# Altium PCB MCU_Module.PcbDoc (part 1 of 2)
Units mil, origin at the board's own origin, x right, y up, seen from the top; angles counter-clockwise.
Board outline 3715 x 2510 mil, 2 copper layers (Top Layer, Bottom Layer); 96 components, 85 nets, 438 pads, 67 vias.
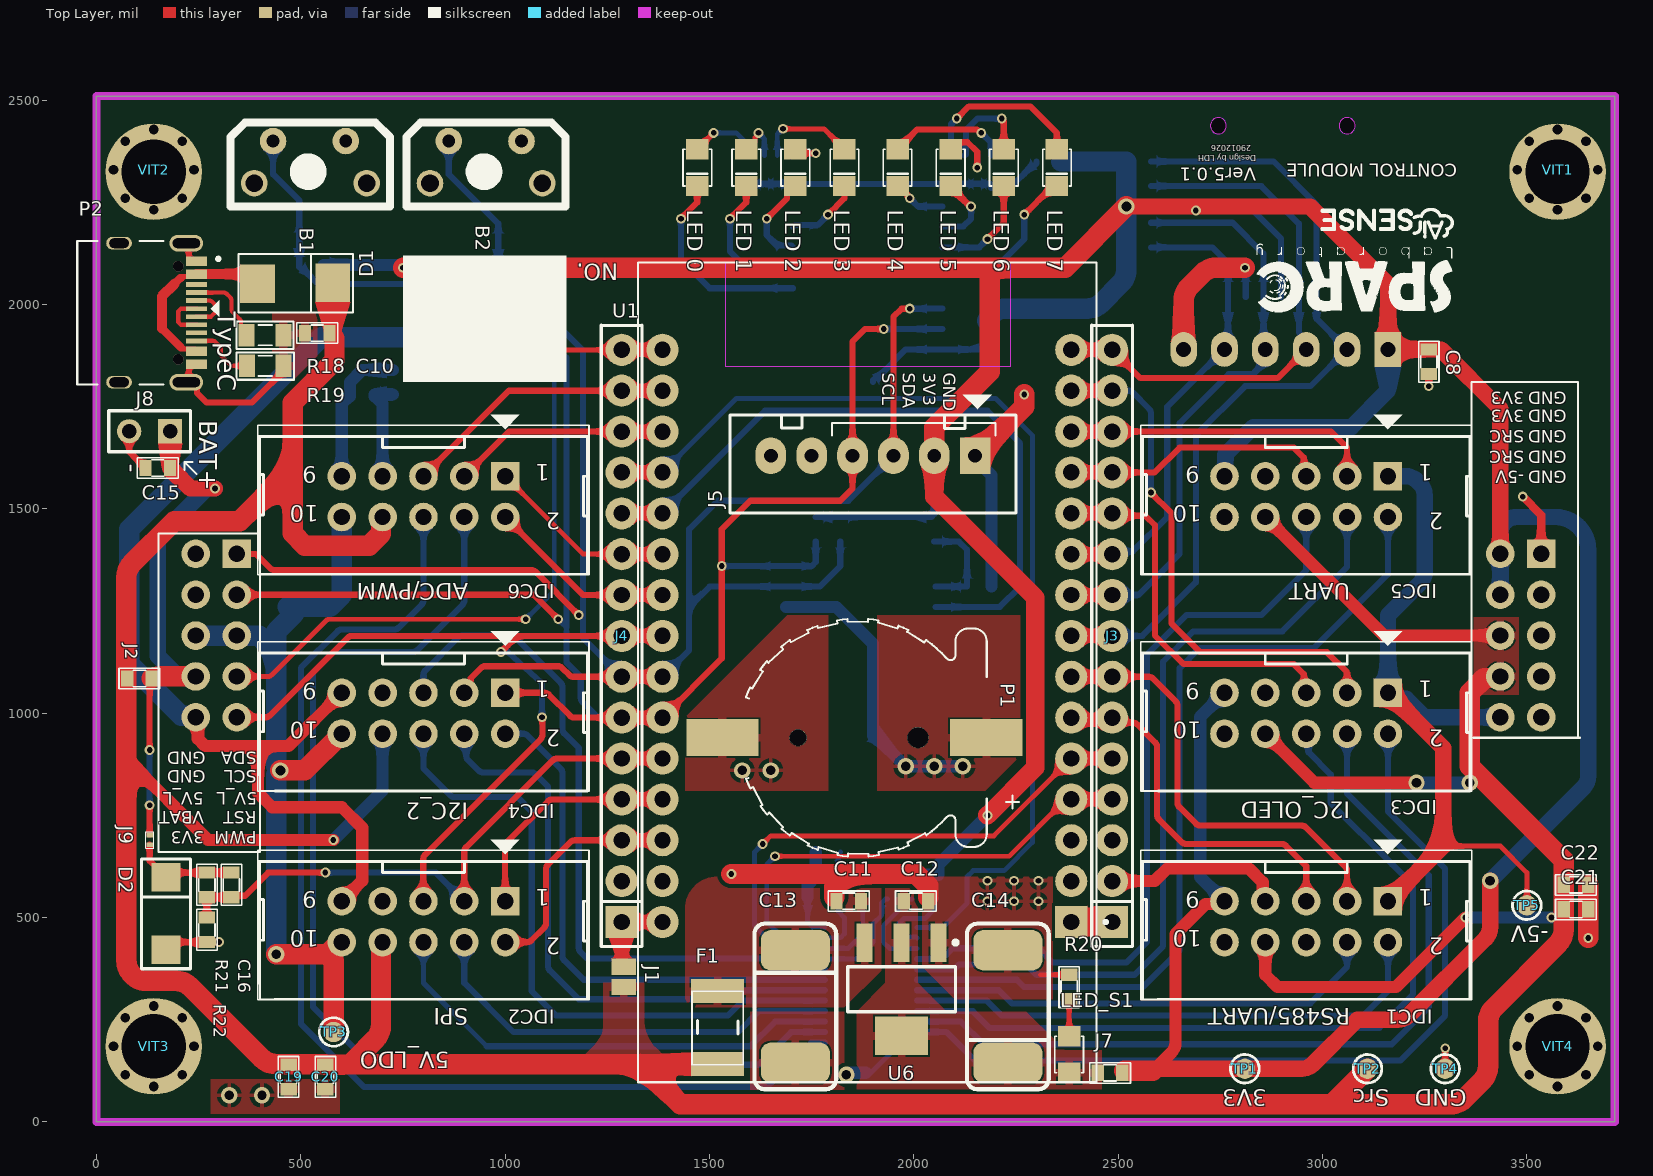
[diagram p0: Top Layer view]
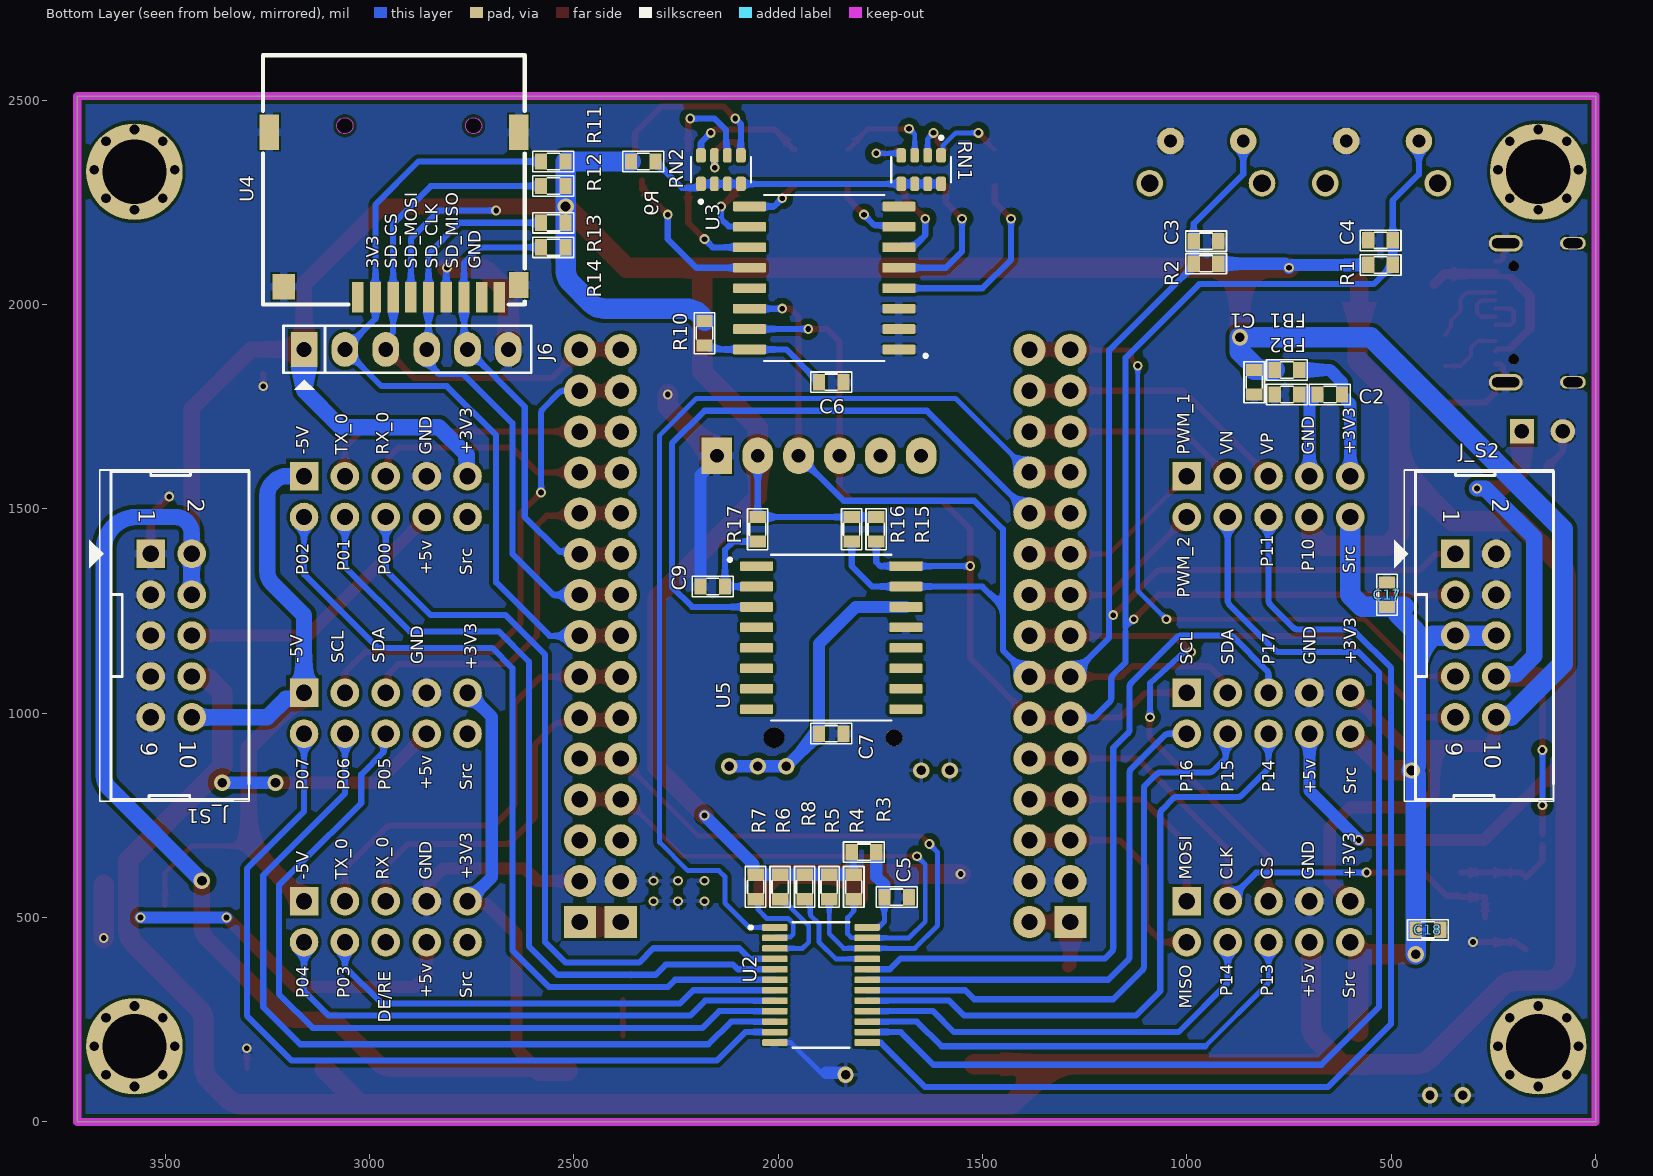
[diagram p1: Bottom Layer view, seen from below]
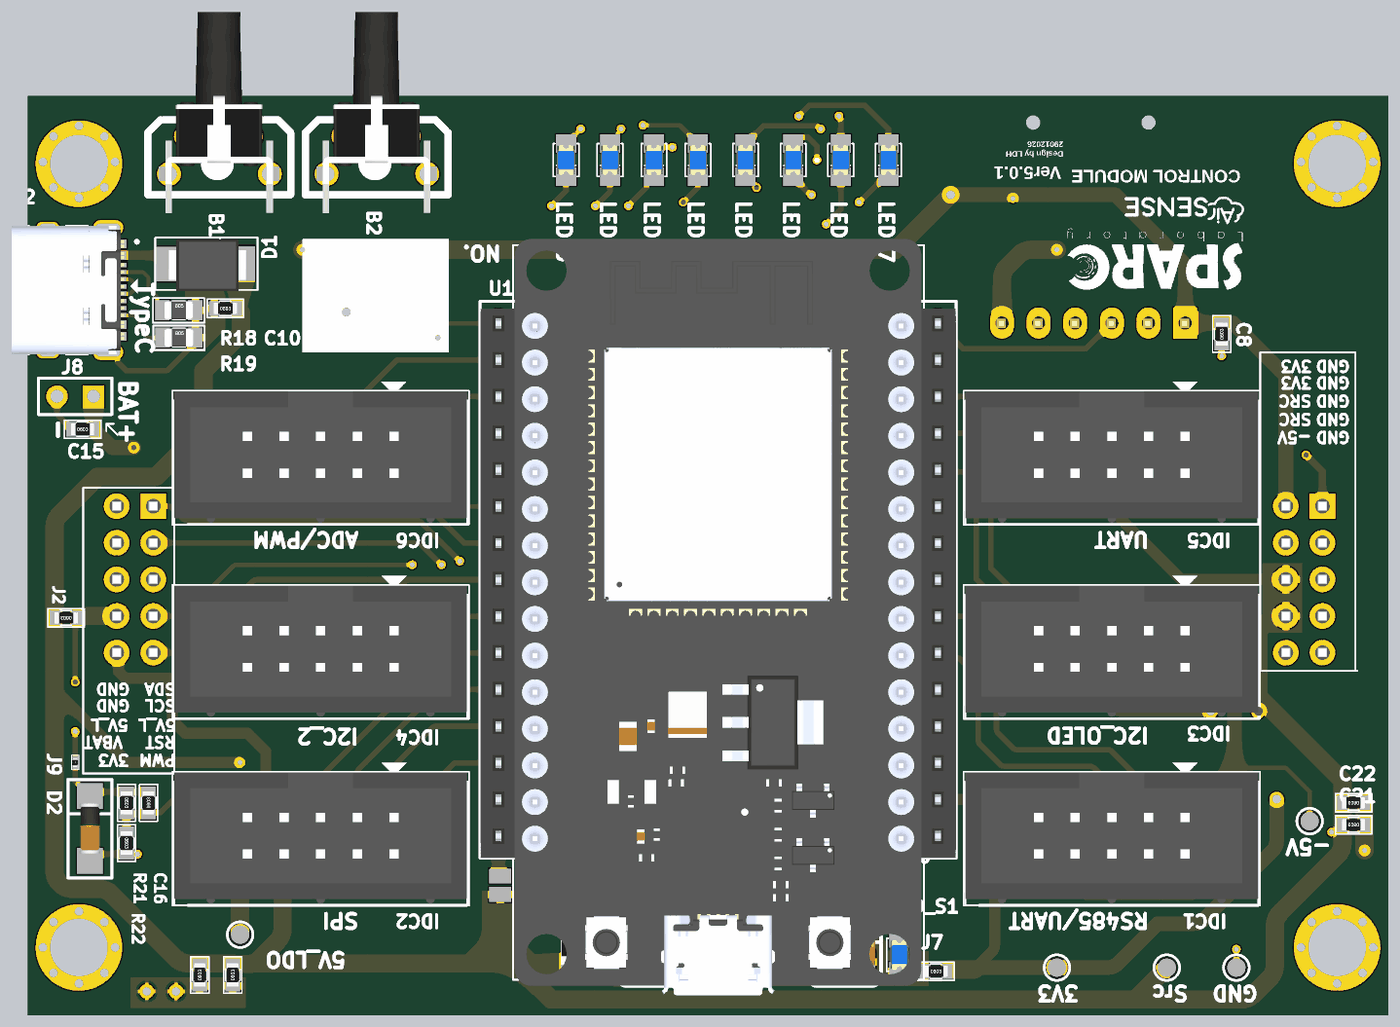
[diagram p3: 3D render of the assembled board from above, using the file's embedded part models]
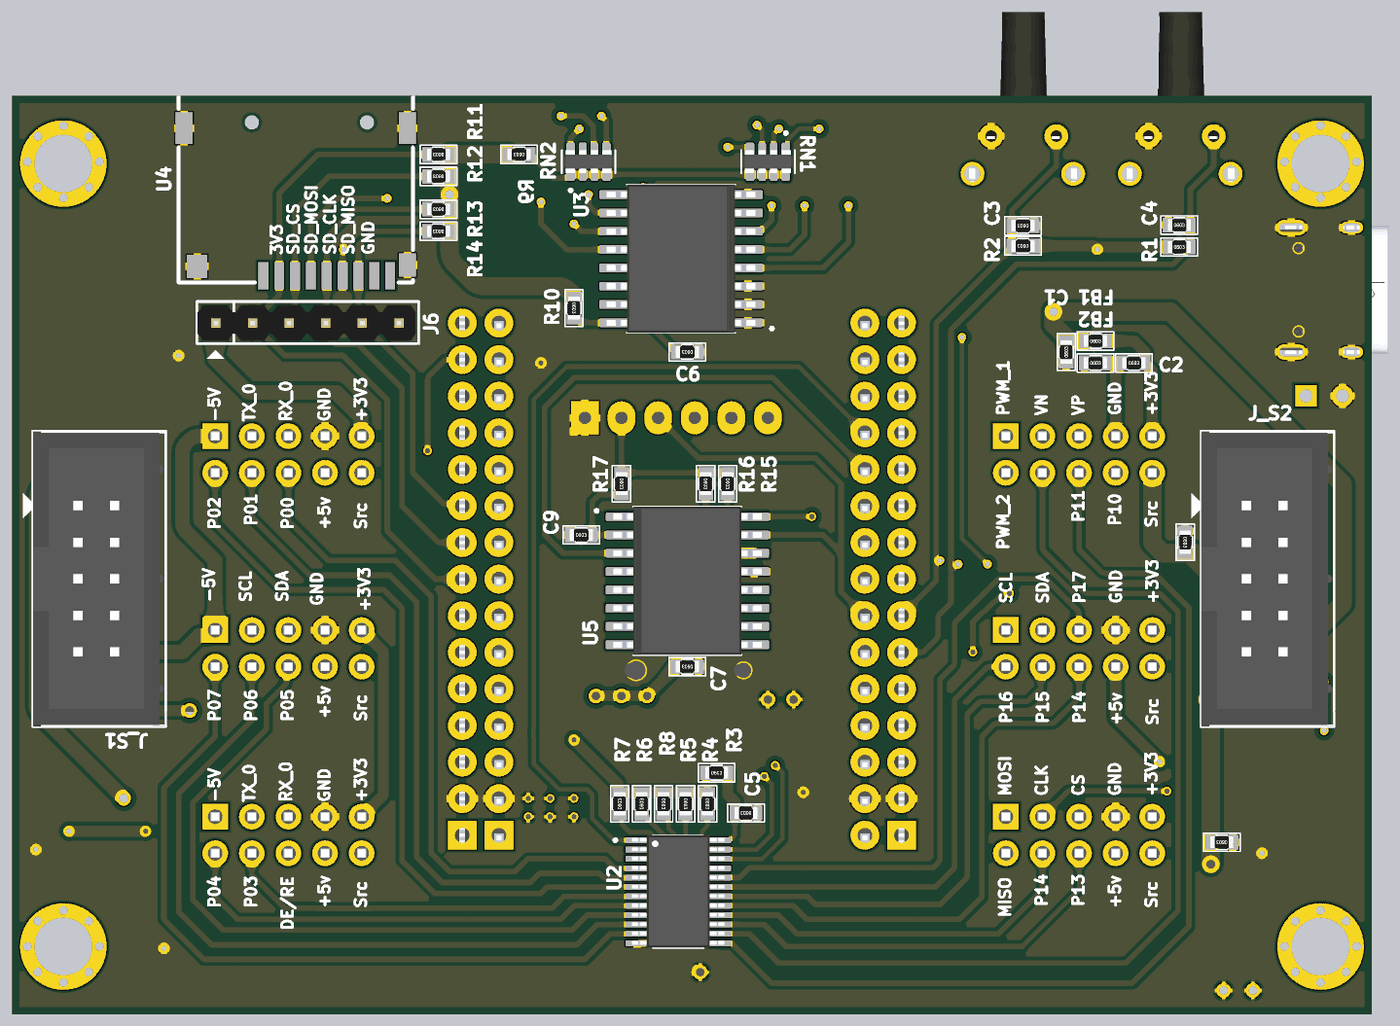
[diagram p4: 3D render of the assembled board from below, using the file's embedded part models]

## Layer stack, top to bottom
Top Solder: solder mask 0.4, Solder Resist, Dk 3.5
Top Layer: signal copper 1.4
Dielectric 1: dielectric 12.6, FR-4, Dk 4.8
Bottom Layer: signal copper 1.4
Bottom Solder: solder mask 0.4, Solder Resist, Dk 3.5

## Board outline
0,0 0,2510 3715,2510 3715,0

## Design rules (kind name [scope] priority, off if disabled: settings)
Clearance [All] p1: gap=0 ignorepadtopadclearanceinfootprint=TRUE except(4: Arc-Via Track-Via SMDPad-SMDPad SMDPad-Via SMDPad-Fill Via-Via; 5: Arc-Arc Arc-Track Track-Track; 6: Arc-SMDPad Arc-THPad Track-SMDPad Track-THPad; 8: SMDPad-THPad SMDPad-Poly SMDPad-Region THPad-THPad THPad-Fill THPad-Poly THPad-Region Fill-Fill Fill-Poly Fill-Region Poly-Poly Poly-Region Region-Region; 10: Arc-Fill Arc-Poly Arc-Region Track-Fill Track-Poly Track-Region THPad-Via; 15: Via-Fill Via-Poly Via-Region)
ComponentClearance [InComponent('U1') vs InComponent('J1')] p1: gap=5 collisioncheckmode=3 verticalgap=5 showdistances=FALSE
HoleSize [All] p1: absolutevalues=TRUE maxlimit=500 minlimit=0 maxpercent=80.000 minpercent=20.000
HoleToHoleClearance [All] p1: gap=0 allowstackedmicrovias=TRUE
MinimumSolderMaskSliver [All] p1: minsoldermaskwidth=0
PlaneClearance [All] p1: clearance=15
PlaneConnect [InNet('GND')] p1: planeconnectstyle=Relief reliefexpansion=20 reliefentries=4 reliefconductorwidth=10 reliefairgap=0
PolygonConnect [All] p1: connectstyle=Relief reliefconductorwidth=20 reliefentries=4 polygonreliefangle="90 Angle" airgapwidth=4
RoutingVias [All] p1: holewidth=28 width=50 viastyle="Through Hole" minholewidth=0 minwidth=20 maxholewidth=300 maxwidth=500 viatemplateguid#1={6EDF6A98-BD5D-4A24-8F05-06F2D03EDB93} viatemplateguid#2={62FAE1AC-254A-4F7D-8758-EC193F30DADA} viatemplateguid#3={902EE12D-42A8-4A52-AAC7-77C11EAEBDF5} viatemplateguid#4={5154B89B-655B-4F70-9889-5CE84DFEF99B} viatemplatename#1=v61h30 viatemplatename#2=v61h30_503323056 viatemplatename#3=v127h71m0 viatemplatename#4=v127h71m0_503323056
SilkToSilkClearance [All] p1: silktosilkclearance=0
SilkToSolderMaskClearance [IsPad] p1: minsilkscreentomaskgap=0 clearancetoexposedcopper=TRUE
SolderMaskExpansion [All] p1: expansion=4 istentingtop=FALSE
SupplyNets "Schematic Supply Nets_7" [InNet('VIN')] p1: voltage=0.000
SupplyNets "Schematic Supply Nets_2" [InNet('5V_LDO')] p2: voltage=0.000
SupplyNets "Schematic Supply Nets_8" [InNet('V_BAT')] p3: voltage=0.000
SupplyNets "Schematic Supply Nets_6" [InNet('3.3V_A')] p4: voltage=0.000
SupplyNets "Schematic Supply Nets" [InNet('GND_A')] p5: voltage=0.000
SupplyNets "Schematic Supply Nets_5" [InNet('-5V')] p6: voltage=0.000
SupplyNets "Schematic Supply Nets_3" [InNet('3.3V')] p7: voltage=0.000
SupplyNets "Schematic Supply Nets_1" [InNet('GND')] p8: voltage=0.000
Width [All] p1: maxlimit=50 minlimit=10 preferedwidth=15
22 further rules are at their usual default settings.

## Classes and differential pairs
component class MCU_Src: C10 C11 C12 C13 C14 C15 C16 C17 C18 C19 C20 C21 C22 D1 D2 F1 J7 J8 J9 LED_S1 P2 R18 R19 R20 R21 R22 U6
component class MCU: B1 B2 BT1 C1 C2 C3 C4 C5 C6 C7 C8 C9 ESP1 FB1 FB2 IDC1 IDC2 IDC3 IDC4 IDC5 IDC6 J1 J2 J3 J4 J5 J6 J_S1 J_S2 JP1 "LED 0" "LED 1" "LED 2" "LED 4" "LED 6" P1 R1 R2 R3 R4 R5 R6 R7 R8 R9 R10 R11 R12 R13 R14 R15 R16 R17 RN1 RN2 TP1 TP2 TP3 TP4 TP5 U1 U2 U3 U4 U5 VIT1 VIT2 VIT3 VIT4 VIT5 VIT6

## Components (designator, comment, footprint, x,y, rotation, side; value= is the part's Value field where it differs from the comment)
B1 "SW" "BUTTON NGHIENG" 538.03,2390 r180 top value="SW chip 2 pin"
B2 "SW" "BUTTON NGHIENG" 968.03,2390 r180 top value="SW chip 2 pin"
C1 "104" CAP_0603 835,1810 r90 bottom value=33p
C2 "104" CAP_0603 650,1780 r180 bottom value=33p
C3 "104" CAP_0603 953.03,2155 r0 bottom value=33p
C4 "104" CAP_0603 526.03,2157 r180 bottom value=33p
C5 "104" CAP_0603 1710,550 r0 bottom value=33p
C6 "104" CAP_0603 1870,1810 r0 bottom value=33p
C7 "104" CAP_0603 1870,950 r0 bottom value=33p
C8 "104" CAP_0603 3260,1860 r90 top value=33p
C9 "104" CAP_0603 2160,1310 r180 bottom value=33p
C10 "104" CAP_0603 540,1930 r0 top value=33p
C11 "104" CAP_0603 1840.57,540 r0 top value=33p
C12 "104" CAP_0603 2005,540 r180 top value=33p
C13 "107" CAP_7343 1710,285 r270 top
C14 "107" CAP_7343 2230,280 r90 top
C15 "104" CAP_0603 150,1600 r0 top value=33p
C16 "104" CAP_0603 330,580 r90 top value=33p
C17 "104" CAP_0603 510,1290 r270 bottom value=33p
C18 "104" CAP_0603 410,470 r0 bottom value=33p
C19 "104" CAP_0603 470,110 r90 top value=33p
C20 "104" CAP_0603 560,110 r90 top value=33p
C21 "104" CAP_0603 3620,520 r180 top value=33p
C22 "104" CAP_0603 3620,580 r180 top value=33p
D1 "Diode Schottky" DIO-214AA(SMB) 480,2050 r180 top
D2 "Zn" DIODE_ZENER_SMD 170,510 r90 top
F1 "2A 8V" RES-SMD-1812 1520,220 r90 top value=Fuse
FB1 "30R/3A" RES-SMD-0603 755,1840 r180 bottom
FB2 "30R/3A" RES-SMD-0603 755,1780 r180 bottom
IDC1 "RS485/UART" IDC10 2960,440 r180 top locked value="Header 5x2"
IDC2 "SPI" IDC10 800,440 r180 top locked value="Header 5x2"
IDC3 "I2C_OLED" IDC10 2960,950 r180 top locked value="Header 5x2"
IDC4 "I2C_2" IDC10 800,950 r180 top locked value="Header 5x2"
IDC5 "UART" IDC10 2960,1480 r180 top locked value="Header 5x2"
IDC6 "ADC/PWM" IDC10 800,1480 r180 top locked value="Header 5x2"
J1 "Jumper2" JUMPER2 1290,380 r90 top net-tie
J2 "Jumper2" RES-SMD-0402 105,1085 r180 top net-tie
J3 "JP15" JP15-C1T 2485,489.17 r90 top
J4 "JP15" JP15-C1T 1285,489.17 r90 top
J5 "Header6" Header6 2150,1630 r180 top
J6 "Header6" JP6 3160,1890 r180 bottom
J7 "Jumper2" RES-SMD-0402 2480,120 r0 top net-tie
J8 "Header 2" HDR1X2 180,1690 r180 top
J9 "Jumper2" RES-SMD-0201 130,690 r270 top
J_S1 "SOURCE" IDC10 3435,1190 r270 bottom locked value="Header 5x2"
J_S2 "SOURCE_SIG" IDC10 243,1190 r270 bottom locked value="Header 5x2"
"LED 0" "LED" LED-0805-Blue 1470,2380 r270 top value="LED 3 ly Single Colour"
"LED 1" "LED" LED-0805-Blue 1590,2380 r270 top value="LED 3 ly Single Colour"
"LED 2" "LED" LED-0805-Blue 1710,2380 r270 top value="LED 3 ly Single Colour"
"LED 3" "LED" LED-0805-Blue 1830,2380 r270 top value="LED 3 ly Single Colour"
"LED 4" "LED" LED-0805-Blue 1960,2380 r270 top value="LED 3 ly Single Colour"
"LED 5" "LED" LED-0805-Blue 2090,2380 r270 top value="LED 3 ly Single Colour"
"LED 6" "LED" LED-0805-Blue 2220,2380 r270 top value="LED 3 ly Single Colour"
"LED 7" "LED" LED-0805-Blue 2350,2380 r270 top value="LED 3 ly Single Colour"
LED_S1 "LED_S" LED-0805-Blue 2380,120 r90 top value="LED 3 ly Single Colour"
P1 "Cell Coin" "S8411 - 45R" 1863.35,940 r90 top
P2 "USB - TypeC - 16P" "USB C 16P" 130,1980 r270 top
R1 "10k" RES-SMD-0603 526.03,2097 r180 bottom
R2 "10k" RES-SMD-0603 953.02,2100 r0 bottom
R3 "0R" RES-SMD-0603 1790,660 r180 bottom
R4 "4.7k" RES-SMD-0603 1815,575 r270 bottom
R5 "4.7k" RES-SMD-0603 1875,575 r270 bottom
R6 "0R" RES-SMD-0603 1995,575 r90 bottom
R7 "0R" RES-SMD-0603 2055,575 r90 bottom
R8 "0R" RES-SMD-0603 1935,575 r270 bottom
R9 "0R" RES-SMD-0603 2330,2350 r0 bottom
R10 "0R" RES-SMD-0603 2180,1930 r270 bottom
R11 "4.7k" RES-SMD-0603 2550,2350 r0 bottom
R12 "4.7k" RES-SMD-0603 2550,2290 r0 bottom
R13 "4.7k" RES-SMD-0603 2550,2200 r0 bottom
R14 "4.7k" RES-SMD-0603 2550,2140 r0 bottom
R15 "4.7k" RES-SMD-0603 1760,1450 r270 bottom
R16 "4.7k" RES-SMD-0603 1820,1450 r270 bottom
R17 "0R" RES-SMD-0603 2050,1450 r270 bottom
R18 "5k1" RES-SMD-0805 412.5,1925 r0 top
R19 "5k1" RES-SMD-0805 413,1850 r0 top
R20 "220" RES-SMD-0603 2380,330 r90 top
R21 "15k 1%" RES-SMD-0603 270,580 r270 top
R22 "43k 1%" RES-SMD-0603 270,470 r270 top
RN1 "20R" RN4_Dual 1650,2330 r270 bottom
RN2 "20R" RN4_Dual 2140,2330 r90 bottom
TP1 "3V3" "Testpoint 50ml" 2810,130 r90 top net-tie
TP2 "Src" "Testpoint 50ml" 3110,130 r90 top net-tie
TP3 "5V_LDO" "Testpoint 50ml" 580,220 r90 top net-tie
TP4 "GND" "Testpoint 50ml" 3300,130 r90 top net-tie
TP5 "-5V" "Testpoint 50ml" 3500,530 r0 top net-tie
U1 "ESP32-WROOM-DEVKIT-V1" ESP32-DEVKIT-V1 1885,1100 r180 top locked
U2 "PCF8575" TSSOP-24 1895,335 r180 bottom
U3 "PCF8574" "SOIC 16 W" 1887.32,2065 r0 bottom
U4 "TF Card Micro SD Card" "SD Card TF Card Micro" 2940,2220 r0 bottom
U5 "DS3231 SMD" "SOIC 16 W" 1870,1185 r180 bottom
U6 "LM1117" SOT-223 1970,324.58 r180 top
VIT1 "1" "Screw Hole 4mm"#1 3575,2330 r0 top locked net-tie
VIT2 "1" "Screw Hole 4mm"#1 140,2330 r0 top locked net-tie
VIT3 "1" "Screw Hole 4mm"#2 140,185 r0 top locked net-tie
VIT4 "1" "Screw Hole 4mm"#2 3575,185 r0 top locked net-tie

## Footprints (in the part's own frame and the unit in brackets; to place one, negate y for a bottom-side part, rotate by r counter-clockwise, add the part's x,y. Pads: shape width x height; smd on the part's side, far side on the other; paste and mask are expansions set on the pad)
"BUTTON NGHIENG" [mil] "BUTTON NGHIENG"
  round 65 hole 31.5: 1(-71.97,-10) 2(105.97,-10)
  round 65 hole 43.31: ""(-123,93) ""(152,93)
  silkscreen extent -180,-55 210,150, body extent -150,-348 180,200, height 494
CAP_0603 [mil]
  rect 30x40 smd: 1(-30,0) 2(30,0)
  silkscreen extent -50,-25 50,25, body extent -31,-16 31,16, height 17
CAP_7343 [mm] "Capacitor Tantalum 7343"
  rrect50% 2.5x4.3 smd: 1(-3.429,0) 2(3.556,0)
  silkscreen extent -5.08,-2.54 5.21,2.54, body extent -3.75,-2.14 3.75,2.16, height 2.8
DIO-214AA(SMB) [mm] "DO-214AA Diode Middle Size"
  rect 2.16x2.4 smd: 1(2.184,-0.025) 2(-2.494,-0.076)
  silkscreen extent -3.76,-1.86 3.35,1.76, body extent -2.98,-1.76 2.42,1.86, height 2.43
DIODE_ZENER_SMD [mil]
  rect 70x70 smd: 1(-88.58,0) 2(88.58,0)
  silkscreen extent -135,-60 134,60, body extent -69,-29 69,29, height 57
ESP32-DEVKIT-V1 [mm] "Dual core, Wi-Fi: 2.4 GHz up to 150 Mbits/s,BLE (Bluetooth Low Energy) and legacy Bluetooth, 32 bits, Up to 240 MHz"
  rect 2x2 / inner round 2 / far side rect 2x2 hole 1.02: 1(-12.7,15.515)
  round 2 hole 1.02: 2(-12.7,12.975) 3(-12.7,10.435) 4(-12.7,7.895) 5(-12.7,5.355) 6(-12.7,2.815) 7(-12.7,0.275) 8(-12.7,-2.265) 9(-12.7,-4.805) 10(-12.7,-7.345) 11(-12.7,-9.885) 12(-12.7,-12.425) 13(-12.7,-14.965) 14(-12.7,-17.505) 15(-12.7,-20.045) 16(12.7,-20.045) 17(12.7,-17.505) 18(12.7,-14.965) 19(12.7,-12.425) 20(12.7,-9.885) 21(12.7,-7.345) 22(12.7,-4.805) 23(12.7,-2.265) 24(12.7,0.275) 25(12.7,2.815) 26(12.7,5.355) 27(12.7,7.895) 28(12.7,10.435) 29(12.7,12.975) 30(12.7,15.515)
  Top Layer keep-out region: 8.78,-25.475 -8.91,-25.475 -8.91,-18.985 8.78,-18.985
  silkscreen extent -14.95,-25.48 14.23,25.48, body extent -14.1,-25.9 14.1,26.55, height 12.77
HDR1X2 [mm] "Connector; Header; 2 Position"
  rect 1.5x1.5 hole 0.9: 1(0,0)
  round 1.5 hole 0.9: 2(2.54,0)
  silkscreen extent -1.27,-1.27 3.81,1.27, body extent -1.27,-1.27 3.81,1.27, height 7
Header6 [mil] "CON6"
  rect 75x90 hole 34: 1(0,0)
  oval 75x90 hole 34: 2(100,0) 3(200,0) 4(300,0) 5(400,0) 6(500,0)
  silkscreen extent -100,-150 600,140
IDC10 [mil]
  rect 70x70 hole 40: 1(-200,-100)
  round 70 hole 40: 2(-200,0) 3(-100,-100) 4(-100,0) 5(0,-100) 6(0,0) 7(100,-100) 8(100,0) 9(200,-100) 10(200,0)
  silkscreen extent -405,-250 405,141, body extent -400,-223 400,135, height 366
JP6 [mil] "JP6"
  rect 65x85 hole 36: 1(0,0)
  oval 65x85 hole 36: 2(100,0) 3(200,0) 4(300,0) 5(400,0) 6(500,0)
  silkscreen extent -50,-99 556,58, body extent -48,-50 548,48, height 323
JP15-C1T [mm] "15 row, straight, gold plating"
  rect 2x2 / inner round 2 / far side rect 2x2 hole 1.02: 1(0,0)
  round 2 hole 1.02: 2(2.54,0) 3(5.08,0) 4(7.62,0) 5(10.16,0) 6(12.7,0) 7(15.24,0) 8(17.78,0) 9(20.32,0) 10(22.86,0) 11(25.4,0) 12(27.94,0) 13(30.48,0) 14(33.02,0) 15(35.56,0)
  silkscreen extent -1.52,-1.27 37.08,1.27, body extent -1.52,-1.25 36.58,1.25, height 8.51
JUMPER2 [mil]
  rect 40x60 smd: 1(-50,0) 2(0,0)
LED-0805-Blue [mil]
  rect 50x55 smd: 1(0,0) 2(90,0)
  silkscreen extent 0,-35 90,35, body extent 5,-25 85,25, height 43
RES-SMD-0201 [mm]
  rect 0.3x0.4 smd: 1(-0.3,0) 2(0.3,0)
  silkscreen extent -0.51,-0.25 0.51,0.25, body extent -0.3,-0.15 0.3,0.15, height 0.22
RES-SMD-0402 [mil]
  rect 30x40 smd: 1(-30,0) 2(30,0)
  silkscreen extent -50,-25 50,25, body extent -31,-16 31,16, height 17
RES-SMD-0603 [mil]
  rect 30x40 smd: 1(-30,0) 2(30,0)
  silkscreen extent -50,-25 50,25, body extent -31,-16 31,16, height 17
RES-SMD-0805 [mil]
  rect 39.37x55 smd: 1(-45,0) 2(45,0)
  silkscreen extent -70,-34 70,33, body extent -39,-25 39,25, height 31
RES-SMD-1812 [mm] "Chip Capacitor, Body 3.2x2.5mm, IPC Medium Density"
  rect 1.5x3.3 smd: 1(-1.996,0) 2(2.54,0)
  silkscreen extent -2.04,-1.6 2.54,1.6, body extent -2,-1.6 2.5,1.6, height 0.6
RN4_Dual [mm]
  rrect50% 0.9x0.61 smd: 1(-0.885,1.24) 4(-0.885,-1.24) 5(0.885,-1.24) 8(0.885,1.24)
  rrect50% 0.9x0.53 smd: 2(-0.885,0.4) 3(-0.885,-0.4) 6(0.885,-0.4) 7(0.885,0.4)
  silkscreen extent -2.08,-1.86 0.8,1.86, body extent -0.8,-1.6 0.8,1.6, height 0.7
"S8411 - 45R" [mm] "Coin Cell Battery Retainer, Horizontal SMT, for CR1220 Coin Cell Batteries, Tape & Reeled"
  rect 2.3x4.5 smd: N(0,8.425) P(0,-7.975)
  round 1.05 hole 1.05 unplated: ""(0,3.725)
  round 1.3 hole 1.3 unplated: ""(0,-3.725)
  silkscreen extent -7.37,-10 7.37,6.96, body extent -7.37,-9.6 7.37,9.6, height 4.25
"Screw Hole 4mm"#1 [mm]
  round 0.6 hole 0.6: 1(-2.5,0) 1(-1.768,-1.768) 1(-1.768,1.768) 1(0,-2.5) 1(0,2.5) 1(1.768,-1.768) 1(1.768,1.768) 1(2.5,0)
  round 6 hole 4: 1(0,-0.127)
"Screw Hole 4mm"#2 [mm]
  round 0.6 hole 0.6: 1(-2.5,0) 1(-1.768,-1.768) 1(-1.768,1.768) 1(0,-2.5) 1(0,2.5) 1(1.768,-1.768) 1(1.768,1.768) 1(2.5,0)
  round 6 hole 4: 1(0,0)
"SD Card TF Card Micro" [mm] "MR01A-01211 TF Card Micro SD Card"
  rect 0.7x1.9 smd: 1(2.25,5.125) 2(1.15,5.125) 3(0.05,5.125) 4(-1.05,5.125) 5(-2.15,5.125) 6(-3.25,5.125) 7(-4.35,5.125) 8(-5.45,5.125) 9(-6.55,5.125)
  rect 1.2x1.6 smd: 10(-7.75,4.375)
  rect 1.2x2.2 smd: 11(-7.75,-5.125) 12(7.75,-5.125)
  rect 1.4x1.6 smd: 13(6.85,4.475)
  Keep-Out Layer board cut-out: -4.45,-5.525 -4.45,-5.624 -4.526,-5.808 -4.667,-5.949 -4.85,-6.025 -5.049,-6.025 -5.233,-5.949 -5.374,-5.808 -5.45,-5.624 -5.45,-5.525 -5.45,-5.425 -5.374,-5.242 -5.233,-5.101 -5.049,-5.025 -4.85,-5.025 -4.667,-5.101 -4.526,-5.242 -4.45,-5.425 -4.45,-5.525 -4.45,-5.525
  Keep-Out Layer board cut-out: 3.55,-5.527 3.55,-5.627 3.474,-5.811 3.333,-5.951 3.15,-6.027 2.951,-6.027 2.767,-5.951 2.626,-5.811 2.55,-5.627 2.55,-5.527 2.55,-5.428 2.626,-5.244 2.767,-5.104 2.951,-5.027 3.15,-5.027 3.333,-5.104 3.474,-5.244 3.55,-5.428 3.55,-5.527 3.55,-5.527
  Keep-Out Layer circle w0.025: c-4.95,-5.525 r0.5
  Keep-Out Layer circle w0.025: c3.05,-5.527 r0.5
  Keep-Out Layer region: -4.45,-5.525 -4.45,-5.624 -4.526,-5.808 -4.667,-5.949 -4.85,-6.025 -5.049,-6.025 -5.233,-5.949 -5.374,-5.808 -5.45,-5.624 -5.45,-5.525 -5.45,-5.425 -5.374,-5.242 -5.233,-5.101 -5.049,-5.025 -4.85,-5.025 -4.667,-5.101 -4.526,-5.242 -4.45,-5.425 -4.45,-5.525 -4.45,-5.525
  Keep-Out Layer region: 3.55,-5.527 3.55,-5.627 3.474,-5.811 3.333,-5.951 3.15,-6.027 2.951,-6.027 2.767,-5.951 2.626,-5.811 2.55,-5.627 2.55,-5.527 2.55,-5.428 2.626,-5.244 2.767,-5.104 2.951,-5.027 3.15,-5.027 3.333,-5.104 3.474,-5.244 3.55,-5.428 3.55,-5.527 3.55,-5.527
  silkscreen extent -8.13,-9.91 8.13,5.59
"SOIC 16 W" [mm] "SOIC 16-Leads, Body 10.5x7.5mm (max), Pitch 1.27mm, IPC Medium Density"
  rrect25% 2.06x0.6 smd: 1(-4.64,4.445) 2(-4.64,3.175) 3(-4.64,1.905) 4(-4.64,0.635) 5(-4.64,-0.635) 6(-4.64,-1.905) 7(-4.64,-3.175) 8(-4.64,-4.445) 9(4.64,-4.445) 10(4.64,-3.175) 11(4.64,-1.905) 12(4.64,-0.635) 13(4.64,0.635) 14(4.64,1.905) 15(4.64,3.175) 16(4.64,4.445)
  silkscreen extent -6.4,-5.15 3.75,5.15, body extent -5.15,-5.15 5.15,5.15, height 2.65
SOT-223 [mm] "SOT223, 4-Leads, Body 6.5x3.5mm, Pitch 2.3mm, Lead Span 7mm, IPC Medium Density"
  rect 1x2.4 smd: 1(-2.3,-2.9) 2(0,-2.9) 3(2.3,-2.9)
  rect 3.3x2.4 smd: 2(0,2.9)
  silkscreen extent -3.48,-3.02 3.35,1.4, body extent -3.23,-3.39 3.27,3.5, height 1.72
"Testpoint 50ml" [mil]
  round 50 smd: 1(0,0)
  silkscreen extent -35,-35 35,35
TSSOP-24 [mm] "TSSOP24"
  rrect25% 1.57x0.41 smd paste+0 mask+0.102: 1(-2.87,3.575) 2(-2.87,2.925) 3(-2.87,2.275) 4(-2.87,1.625) 5(-2.87,0.975) 6(-2.87,0.325) 7(-2.87,-0.325) 8(-2.87,-0.975) 9(-2.87,-1.625) 10(-2.87,-2.275) 11(-2.87,-2.925) 12(-2.87,-3.575) 13(2.87,-3.575) 14(2.87,-2.925) 15(2.87,-2.275) 16(2.87,-1.625) 17(2.87,-0.975) 18(2.87,-0.325) 19(2.87,0.325) 20(2.87,0.975) 21(2.87,1.625) 22(2.87,2.275) 23(2.87,2.925) 24(2.87,3.575)
  silkscreen extent -4.47,-3.9 1.77,3.9, body extent -3.2,-3.87 3.2,3.93, height 1.1
"USB C 16P" [mm]
  rect 0.6x1.3 smd: A1_B12(-3.2,2.921) A4_B9(-2.4,2.921) B1_A12(3.2,2.921) B4_A9(2.4,2.921)
  rect 0.3x1.3 smd: A5(-1.25,2.921) A6(-0.25,2.921) A7(0.25,2.921) A8(1.25,2.921) B5(1.75,2.921) B6(0.75,2.921) B7(-0.75,2.921) B8(-1.75,2.921)
  oval 1.05x2.1 hole 0.6 slot 1.7 at 90 deg: S1(-4.32,2.281) S2(4.32,2.281)
  oval 0.8x1.6 hole 0.6 slot 1.2 at 90 deg: S3(-4.32,-1.899) S4(4.32,-1.899)
  round 0.65 hole 0.65 unplated: ""(-2.89,1.781) ""(2.89,1.781)
  silkscreen extent -4.47,-4.5 4.47,4.37, body extent -4.47,-4.41 4.47,3.4, height 3.26

## Part data
B1 B2: library part SW2, "Switch button 2 pin"
C1 C2 C3 C4 C5 C6 C7 C8 C9 C11 C12 C15 C16 C17 C18 C19 C20 C21 C22: library part CapSMD, "Capacitor SMD 0603", LatestRevisionDate=17-Jul-2002, LatestRevisionNote="Re-released for DXP Platform.", PackageReference=RAD-0.3, Published=8-Jun-2000, Publisher="Altium Limited"
C10: library part CapSMD, "Capacitor", LatestRevisionDate=17-Jul-2002, LatestRevisionNote="Re-released for DXP Platform.", PackageReference=RAD-0.3, Published=8-Jun-2000, Publisher="Altium Limited"
C13 C14: library part CAP_TAN_SMD, "Polazied Tantalum Capacitor"
D1: "SS54"
D2: library part Zenner, "generic zenner diode"
F1: library part Fuse, "https://linhkien.cxtvn.com/5126-cau-chi-tu-phuc-hoi-pptc-2a-8v-smd1812.html", Designed by=VanDungEvn
FB1 FB2: library part "Ferrit Bead", "FB SMD 0603"
IDC1 IDC2 IDC3 IDC4 IDC5 IDC6 J_S1 J_S2: library part "IDC 5X2"
J1 J2 J7 J9: "Jumper, 2-Pin"
J3 J4: "WR-PHD 2.54 mm Angled Socket Header", Manufacturer="W¨¹rth Elektronik eiSos GmbH", partNo=613015143121, ComponentLink1 Description=Manufacturer, ComponentLink1URL=http://www.we-online.com, ComponentLink2 Description=Datasheet, ComponentLink2URL=http://katalog.we-online.de/em/datasheet/6130xx143121.pdf, Created by="Karrer Zheng", Created Date="29 March 2013", NoPins=15
J5 J6: "Header IDC, 6 x 1 Pin Vertical 2.54mm Pitch (Non-Boxed, Male)", Manufacturer="W¨¹rth Elektronik eiSos GmbH", partNo=613002143121, ComponentLink1 Description=Manufacturer, ComponentLink1URL=http://www.we-online.com, ComponentLink2 Description=Datasheet, ComponentLink2URL=http://katalog.we-online.de/em/datasheet/6130xx143121.pdf, Created by="Karrer Zheng", Created Date="29 March 2013", NoPins=02
J8: "Header, 2-Pin", LatestRevisionDate=17-Jul-2002, LatestRevisionNote="Re-released for DXP Platform.", Publisher="Altium Limited"
"LED 0" "LED 1" "LED 2" "LED 3" "LED 4" "LED 5" "LED 6" "LED 7": "LED Single colour Green and Red"
LED_S1: library part LED, "LED Single colour Green and Red"
P1: library part S8411-45R, "Coin Cell Battery Retainer, Horizontal SMT, for CR1220 Coin Cell Batteries, Tape & Reeled"
R1 R2 R3 R4 R5 R6 R7 R8 R9 R10 R11 R12 R13 R14 R15 R16 R17 R20 R21 R22: library part "Resistor - SMD", "Resistor SMD 0603", Manufacturer="Generic Components", Class=Passive, Published=08/06/2000, Publisher="Altium Hobart Technology Centre"
R18 R19: library part "Resistor - SMD", "Resistor SMD", Manufacturer="Generic Components", Class=Passive, Published=08/06/2000, Publisher="Altium Hobart Technology Centre"
RN1 RN2: library part RN4_Dual, "RN4 Dual resistor"
TP1 TP2 TP3 TP4 TP5: library part Testpoint
U1: "EVAL BOARD FOR ESP-WROOM-32"
U2: library part PCF8575DW, "https://shopee.vn/Set-5-Linh-Ki%E1%BB%87n-%C4%90i%E1%BB%87n-T%E1%BB%AD-Pcf8575Ts-Pcf8575-Ssop-24-Pcf8575Pwr-Pf575-Tssop-24-i.354017206.7468807321?extraParams=%7B%22display_model_id%22%3A25981768845%2C%22model_selection_logic%22%3A3%7D&sp_atk=da7bae07-f57c-4d15-a7da-c831ba5df15d&xptdk=da7bae07-f57c-4d15-a7da-c831ba5df15d"
U3: "I2C PORT EXPANDER", Frequency - Clock=100KHz, Manufacturer="NXP Semiconductors", Manufacturer Part Number=PCF8574T/3,512, Operating Temperature="-40°C ~ 85°C", Package / Case="16-SOIC (7.5mm Width)", Supplier Part Number=568-1076-5-ND, Voltage - Supply="2.5 V ~ 6 V", Category="Integrated Circuits (ICs)", Includes=POR, Interface=I²C, Interrupt Output=Yes, Number of I /O=8, Packaging=Tube, RoHS="RoHS Compliant", Supplier=Digi-Key, Supplier 1=Digi-Key, Supplier Part Number 1=568-1076-5-ND
U4: "https://linhkien.cxtvn.com/5532-mr01a-01211-tf-card-micro-sd-card.html"
U5: "SOIC"
U6: "3V3 5V LDO, AMS1117, LDI1117", Creator="Nguyen Ba Bien", Website=http://group3i.net
VIT1 VIT2 VIT3 VIT4: library part VIT, "Oc Vit"
P2: componentlink1description="New link", ComponentLink1URL=https://linhkien.cxtvn.com/6914-cong-type-c-cai-16p-usb-31-v2.html

## Via types
v1: diameter 24, hole 14, Top Layer to Bottom Layer, 52 vias
v2: diameter 40, hole 23, Top Layer to Bottom Layer, 9 vias
v3: diameter 40, hole 24, Top Layer to Bottom Layer, 6 vias

## Nets (pads, with @x,y where several pads share a name; then routed paths per layer and width w, separated by ;. In a path a pad name is that pad's centre, name@x,y a point inside that pad or via, vN(x,y) a via of type N, cw(c..) or ccw(c..) an arc to the next point about the centre after c; other vN are vias at no path point)
3.3V: C1.2 C8.2 FB1.1 IDC1.9 IDC2.9 IDC3.9 IDC4.9 IDC5.9 J5.2 J6.1 J7.2 J_S1.2 J_S1.4 J_S2.10 R1.1 R2.1 R3.1 R4.1 R5.1 R6.2 R7.2 R8.1 R9.2 R10.1 R11.1 R12.1 R13.1 R14.1 R15.1 R16.1 R17.1 TP1.1 U4.4 | length 14559.3
  Top Layer w30: J_S2.10@243,990 248.07,984.93 248.07,937.57 265.64,920 395,920 ; IDC2.9@600,540 650,590 650,720 600,770 430,770 395,805 395,920 ; IDC4.9@600,1050 470,920 395,920 ; 2590,130 2631.24,171.24 ccw(c2610,192.43) 2634,174.43 ccw(c2610,192.43) 2640,192.43 2640,460 2713.43,533.43 2753.43,533.43 IDC1.9@2760,540
  Top Layer w40: v3(2520,2240) 2969.47,2240 3160,2049.47 J6.1@3160,1890 3290,1890 3435,1745 J_S1.2@3435,1390 ; 2590,130 TP1.1@2810,130 2948.43,130 ccw(c2948.43,170) 2972.43,138 ccw(c2948.43,170) 2976.72,141.72 3085,250 3183.43,250 ccw(c3183.43,290) 3207.43,258 ccw(c3183.43,290) 3211.67,261.67 3398.33,448.33 ccw(c3370,476.57) 3402,452.57 ccw(c3370,476.57) 3410,476.57 v3(3410,590)
  Top Layer w45: J5.2@2050,1630 2050,1530 2297,1283 2297,867 v1(2180,750)
  Top Layer w50: v1(750,2090) 870,2090 ; v2(870,1920) 870,2090 ; J5.2@2050,1630 2050,1700 2185.71,1835.71 2185.71,2075.71 2200,2090 ; J7.2@2515,125 2585,125 ; v3(2520,2240) 2370,2090 870,2090
  Bottom Layer w12: R4.1@1815,605 1815,655 R3.1@1820,660
  Bottom Layer w15: R15.1@1760,1480 R16.1@1820,1480 1880,1480 2042.5,1480.01 2050,1487.51 J5.2@2050,1630 ; v1(2690,2230) 2830,2230 2898.66,2161.34 U4.4@2898.66,2018.22
  Bottom Layer w30: R1.1@556.04,2097 743,2097 v1(750,2090) 760,2100 R2.1@923.02,2100 ; R4.1@1810,605 R4.1@1815,605 1828.79,605 1869.99,605 R5.1@1875,605 1888.79,605 1929.99,605 R8.1@1935,605 1940,605 R6.2@1995,605 R7.2@2055,605 2060,605 2060,630 v1(2180,750) ; IDC1.9@2760,540 2700.5,599.5 2700.5,990.5 IDC3.9@2760,1050
  Bottom Layer w40: IDC5.9@2760,1580 2762.17,1582.17 2762.17,1632.17 2830,1700 3070,1700 3160,1790 J6.1@3160,1890 ; v3(3410,590) 3638.28,818.28 ccw(c3610,846.57) 3642,822.57 ccw(c3610,846.57) 3650,846.57 3650,1400 ccw(c3570,1400) 3570,1480 3475,1480 ccw(c3475,1440) 3435,1440 J_S1.2@3435,1390 J_S1.4@3435,1290
  Bottom Layer w50: J_S2.10@243,990 239.17,993.83 207.45,993.83 80,1121.27 80,1450 550,1920 v2(870,1920) 870,1885 C1.2@827.5,1842.49 ; FB1.1@785,1840 827.5,1840 C1.2@835,1839.99 ; R10.1@2180,1960 cw(c2225.82,1940) 2225.82,1990 2424.29,1990 ccw(c2424.29,2040) 2459.64,2004.64 2505.4,2050.4 ccw(c2470,2085.71) 2520,2085.71 R13.1@2520,2200 R12.1@2520,2290 R11.1@2520,2350 R9.2@2360,2350
3.3V_A: C2.2 FB1.2 IDC6.9 | length 357.1
  Bottom Layer w30: IDC6.9@600,1580 600,1757.43 617.57,1775 620,1775 C2.2@620,1780 620,1810 650,1840 FB1.2@725,1840
3V3_MCU: J3.1 U1.1 | length 100
  Top Layer w50: U1.1@2385,489.17 J3.1@2485,489.17
5V_LDO: C17.2 C18.2 IDC2.10 IDC4.10 IDC6.10 J_S2.5 J_S2.6 TP3.1 | length 1965.9
  Top Layer w50: v3(440,410) 564.59,410 ; v3(450,860) 510,860 IDC4.10@600,950 ; TP3.1@580,220 580,394.59 564.59,410 ; IDC2.10@600,440 594.59,440 564.59,410
  Bottom Layer w50: J_S2.6@243,1190 J_S2.5@343,1190 343.34,1189.66 398.22,1189.66 440,1147.88 ; v3(440,410) 440,850 v3(450,860) 440,870 440,1147.88 ; 468,1260 570.71,1260 600,1289.29 IDC6.10@600,1480 ; 484,1244 440,1200 440,1147.88
-5V: IDC1.1 IDC3.1 IDC5.1 J_S1.10 TP5.1 | length 1868.2
  Top Layer w12: 3295,675 3435,675 3500,610 TP5.1@3500,530
  Top Layer w40: IDC1.1@3160,540 3295,675 3295,915 IDC3.1@3160,1050
  Bottom Layer w40: IDC5.1@3160,1580 3203.43,1580 cw(c3203.43,1540) 3231.68,1568.32 3238.32,1561.68 cw(c3210,1533.43) 3250,1533.43 3250,1346.57 cw(c3210,1346.57) 3242,1322.57 cw(c3210,1346.57) 3238.28,1318.28 3160,1240 IDC3.1@3160,1050 3175,1035 3205,1035 3250,990 J_S1.10@3435,990
Button01: B1.2 C4.2 IDC4.1 J4.6 J5.4 J_S2.3 R1.2 R15.2 U1.25 U3.15 U5.16 | length 5057.6
  Top Layer w15: J_S2.3@343,1290 1070,1290 v1(1130,1230) ; IDC4.1@1000,1050 1096.3,1050 cw(c1096.3,1035) 1105.3,1047 cw(c1096.3,1035) 1106.89,1045.62 1158.97,993.55 ccw(c1169.56,1004.17) 1160.56,992.17 ccw(c1169.56,1004.17) 1169.56,989.17 J4.6@1285,989.17 ; U1.25@1385,989.17 1530,1134.17 v1(1530,1360) 1530,1450 1600,1520 1820,1520 1850,1550 J5.4@1850,1630 1850,1910 1880,1940 v1(1926.5,1940)
  Top Layer w30: J4.6@1285,989.17 U1.25@1385,989.17
  Bottom Layer w12: v1(1130,1230) 1150,1210 1150,1200
  Bottom Layer w15: B1.2@432.06,2400 432.06,2318.85 496.04,2254.88 C4.2@496.04,2157 R1.2@496.04,2097 496.04,2092 503.54,2084.5 508.54,2084.5 543.04,2050 970,2050 1150,1870 1150,1210 ; 1150,1200 1150,1124.17 1180.61,1093.57 cw(c1170,1082.96) 1182,1091.96 cw(c1170,1082.96) 1185,1082.96 1185,1037.67 ccw(c1200,1037.67) 1188,1028.67 ccw(c1200,1037.67) 1189.2,1027.25 ccw(c1200.01,1037.66) 1189.35,1027.1 1189.39,1027.06 1227.28,989.17 J4.6@1285,989.17 ; v1(1530,1360) U5.16@1687.32,1360 1750,1360 1760,1370 R15.2@1760,1420 ; v1(1926.5,1940) U3.15@2070,1940
Button02: B2.2 C3.2 IDC4.3 J4.7 J5.3 J_S2.1 R2.2 R16.2 U1.24 U3.14 U5.15 | length 4820.6
  Top Layer w15: J_S2.1@343,1390 370.5,1390 383.79,1390 cw(c383.79,1375) 394.39,1385.61 425.59,1354.41 ccw(c436.21,1365) 436.21,1350 1063.79,1350 cw(c1063.79,1335) 1072.79,1347 cw(c1063.79,1335) 1074.39,1345.61 v1(1180,1240) ; IDC4.3@900,1050 900,1064.88 915.66,1080.54 915.66,1085.66 940.61,1110.61 cw(c951.21,1100) 940.64,1110.64 cw(c951.21,1100) 942.21,1112 cw(c951.21,1100) 951.21,1115 1128.79,1115 cw(c1128.79,1100) 1139.39,1110.61 1156.45,1093.55 ccw(c1167.04,1104.17) 1167.04,1089.17 J4.7@1285,1089.17 ; J5.3@1950,1630 1950,1970 1970,1990 v1(1990,1990)
  Top Layer w30: J4.7@1285,1089.17 U1.24@1385,1089.17
  Bottom Layer w15: B2.2@862.06,2400 862.06,2318.85 983.03,2197.88 C3.2@983.03,2155 983.03,2090 990.53,2082.5 995.53,2082.5 1190,1888.03 1190,1184.17 J4.7@1285,1089.17 ; U1.24@1385,1089.17 1450,1154.17 1450,1260 ; R16.2@1820,1420 1820,1360 1770,1310 U5.15@1687.32,1310 1500,1310 1450,1260 ; J5.3@1950,1630 1840,1520 1520,1520 1450,1450 1450,1260 ; v1(1990,1990) U3.14@2070,1990
D+: P2.A7 P2.B7 | length 117.1
  Top Layer w10: P2.A7@245,1970.16 280.16,1970.16 290,1980 290,1995.82 ccw(c280,1995.82) 288,2001.82 ccw(c280,1995.82) 287.09,2002.87 283.35,2006.61 ccw(c276.29,1999.53) 276.29,2009.53 P2.B7@245,2009.53
D-: P2.A6 P2.B6 | length 121.1
  Top Layer w10: P2.B6@245,1950.47 207.03,1950.47 200,1957.5 200,1982.81 207.03,1989.84 P2.A6@245,1989.84
DE/RE: IDC1.6
GND: B1.1 B2.1 C1.1 C3.1 C4.1 C5.1 C6.1 C7.1 C8.1 C9.1 C10.1 C11.1 C12.1 C13.2 C14.2 C15.1 C17.1 C18.1 C19.1 C20.1 C21.1 C22.1 D2.1 FB2.1 IDC1.7 IDC2.7 IDC3.7 IDC4.7 IDC5.7 J3.2 J4.2 J5.1 J6.6 J8.2 J_S1.1 J_S1.3 J_S1.5 J_S1.7 J_S1.9 J_S2.2 J_S2.4 P1.N P2.A1_B12 P2.B1_A12 P2.S1 P2.S2 P2.S3 P2.S4 R18.2 R19.2 R20.2 R22.2 TP4.1 U1.2 U1.29 U2.12 U3.1 U3.2 U3.3 U3.8 U4.6 U4.10 U4.11 U4.12 U4.13 U5.13 U6.1 | length 3284.7
  Top Layer w12: P2.S2@219.8,1809.92 225.57,1815.69 225.57,1848.2 231.38,1854.02 P2.B1_A12@245,1854.02 ; P2.S1@219.8,2150.08 225.57,2144.31 225.57,2111.8 231.38,2105.98 P2.A1_B12@245,2105.98 ; 2310,360 R20.2@2380,360 ; TP4.1@3300,130 v1(3300,180)
  Top Layer w15: J8.2@80,1690 80,1640 107.5,1612.5 112.5,1612.5 120,1605 C15.1@120,1600 ; D2.1@170,421.42 197.5,440 v1(300,440) ; P2.S2@219.8,1809.92 233.35,1809.92 245.51,1797.75 245.51,1784.21 269.72,1760 380,1760 445.81,1825.81 445.81,1837.81 R19.2@458,1850 ; v1(3260,1800) C8.1@3260,1830
  Top Layer w20: v1(3490,1530) 3535,1485 J_S1.1@3535,1390
  Top Layer w30: J3.2@2485,589.17 2589.17,589.17 2620,620 2820,620 2853.43,586.57 2853.43,546.57 IDC1.7@2860,540
  Top Layer w50: v1(1553.4,606.6) 1836.6,606.6 ; C11.1@1805,550 1805,575 1836.6,606.6 ; C12.1@2035,550 2035,577.31 2005.71,606.6 1836.6,606.6 ; J5.1@2150,1630 2150,1637.5 2162.5,1650 2170,1650 2270,1750 v1(2270,1780) ; J6.6@2660,1890 2660,2009.29 cw(c2710,2009.29) 2674.59,2044.59 2705.41,2075.41 cw(c2740.71,2040) 2740.71,2090 v1(2810,2090) ; v1(3650,450) C21.1@3650,520 C22.1@3650,580
  Bottom Layer w12: 1882.5,120 1895,120 1969,194 2007.74,194 U2.12@2007.99,194.25
  Bottom Layer w15: v1(2810,2090) 2810,2087.56 2812.05,2085.52 U4.6@2812.05,2018.22
  Bottom Layer w30: v2(1835,115) 1837.71,115 1842.71,120 1882.5,120 ; J5.1@2150,1630 2150,1622.5 2190,1582.5 C9.1@2190,1310
  other v1: 2180,540 2245,540 2305,540 2180,590 2245,590 2305,590
  other v2: 325,65 405,65 1580,860 1650,860
GND_A: C2.1 FB2.2 IDC6.7 | length 254.7
  Bottom Layer w30: IDC6.7@700,1580 700,1757.43 682.43,1775 680,1775 C2.1@680,1780 FB2.2@725,1780
I2CHW_SCL: IDC3.3 J3.14 U1.14 | length 1284.5
  Top Layer w15: v1(2580,1540) 2630,1490 2630,1220 2700.5,1149.5 3010.5,1149.5 3060,1100 IDC3.3@3060,1050
  Top Layer w30: U1.14@2385,1789.17 J3.14@2485,1789.17
  Bottom Layer w15: J3.14@2485,1789.17 2524.61,1789.17 cw(c2524.61,1774.17) 2535.21,1784.79 2575.62,1744.38 cw(c2565,1733.79) 2577,1742.79 cw(c2565,1733.79) 2580,1733.79 v1(2580,1540)